# Altium PCB NIXIEclock未铺地.PcbDoc (part 2 of 2)
Units mil, origin at the board's own origin, x right, y up, seen from the top; angles counter-clockwise.
Board outline 8475 x 2960 mil, 2 copper layers (Top Layer, Bottom Layer); 232 components, 292 nets, 854 pads, 200 vias.
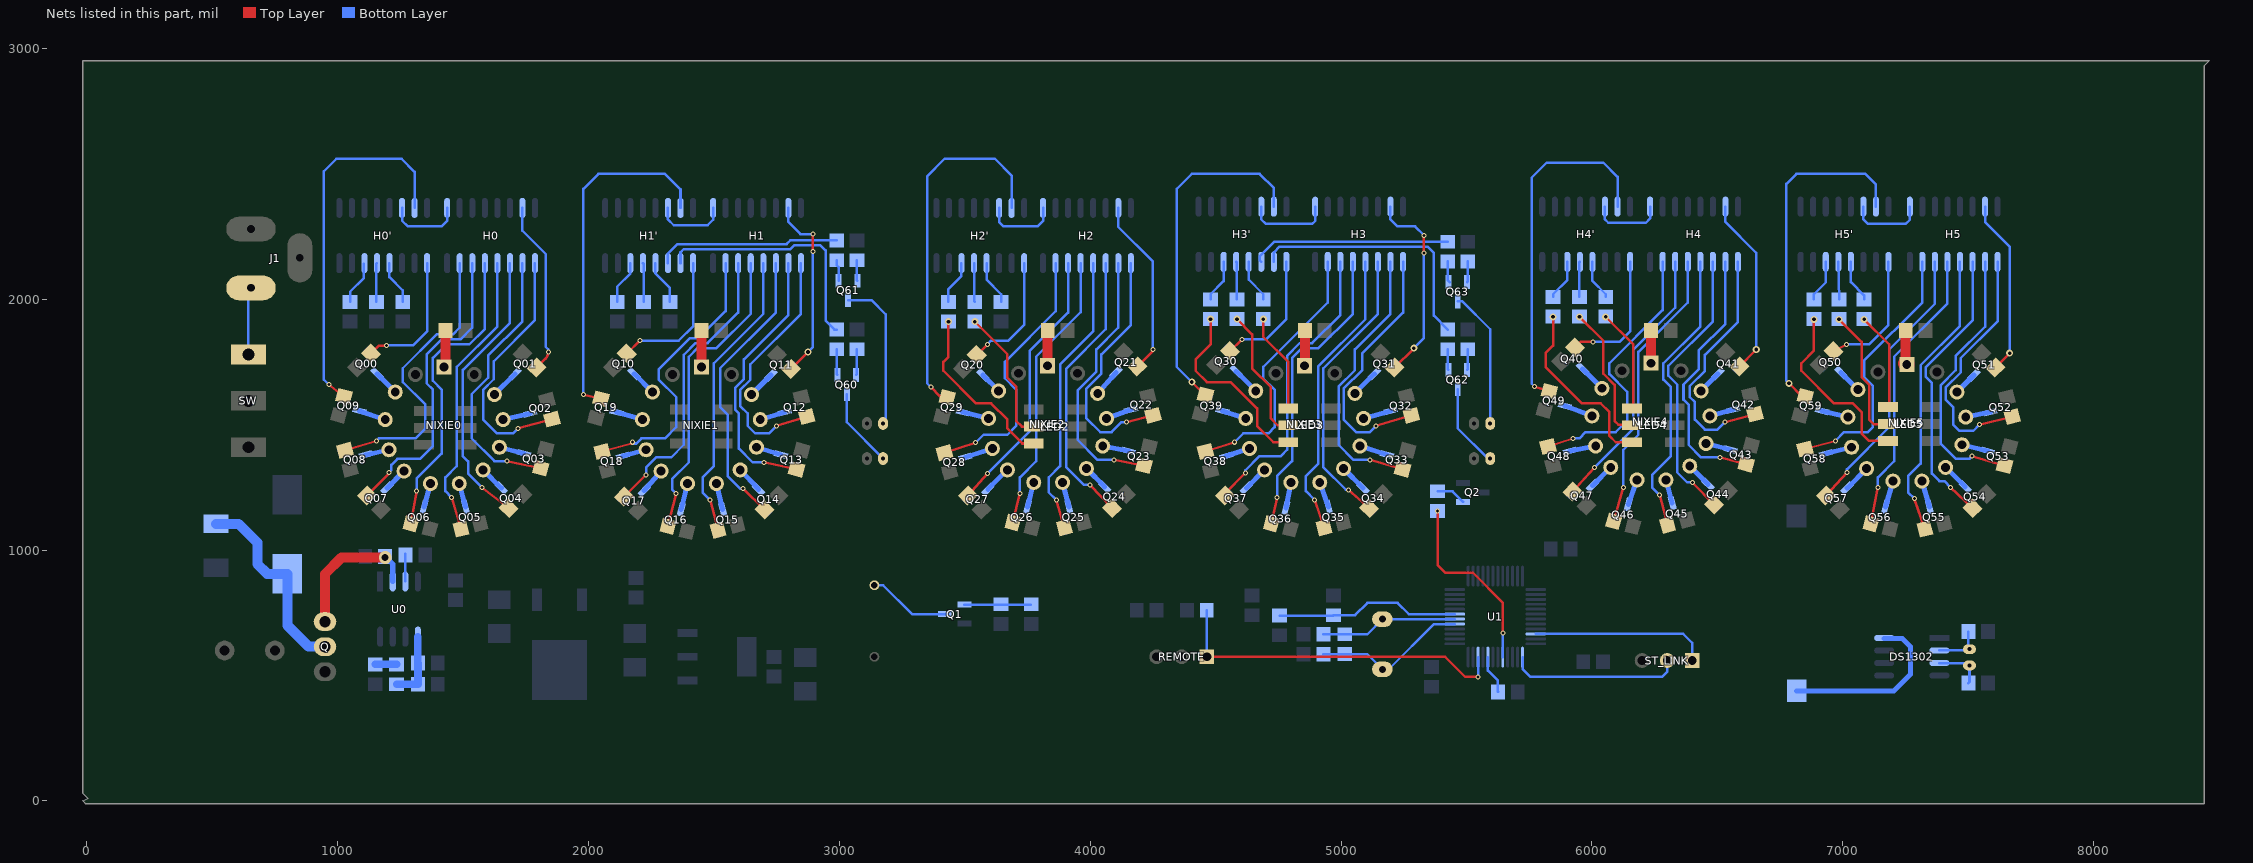
[diagram p2: the nets of this part, all layers, seen from the top]

## Via types
v1: diameter 20, hole 12, Top Layer to Bottom Layer, 85 vias
v2: diameter 28, hole 15, Top Layer to Bottom Layer, 84 vias
v3: diameter 30, hole 20, Top Layer to Bottom Layer, 23 vias
v4: diameter 118.11, hole 118.11, Top Layer to Bottom Layer, 4 vias
v5: diameter 50, hole 28, Top Layer to Bottom Layer, 2 vias
v6: diameter 59.06, hole 59.06, Top Layer to Bottom Layer, 2 vias

## Nets (pads, with @x,y where several pads share a name; then routed paths per layer and width w, separated by ;. In a path a pad name is that pad's centre, name@x,y a point inside that pad or via, vN(x,y) a via of type N, cw(c..) or ccw(c..) an arc to the next point about the centre after c; other vN are vias at no path point) (continued)
LED2.G: LED2.3 R81.2 | length 704.5
  Top Layer w10: v2(3435,1910.63) 3435,1770 3415,1750 3415,1715 3545,1585 3605,1585 3670,1520 3670,1485 3730,1425 LED2.3@3775,1425
LED2.R: LED2.2 R80.2 | length 543.3
  Top Layer w10: v2(3540,1910.63) 3670,1780.63 3670,1686.36 3705,1651.36 3705,1515 3727.5,1492.5 LED2.2@3775,1492.5
LED3.B: LED3.1 R94.2 | length 397.1
  Top Layer w10: v2(4690,1920.63) 4690,1850 4790,1750 LED3.1@4790,1565
LED3.G: LED3.3 R96.2 | length 759.5
  Top Layer w10: v2(4480,1920.63) 4480,1820 4420,1760 4420,1715 4465,1670 4560,1670 4665,1565 4665,1495 4730,1430 LED3.3@4790,1430
LED3.R: LED3.2 R95.2 | length 532.9
  Top Layer w10: v2(4585,1920.63) 4645.63,1860 4645.63,1724.37 4720,1650 4720,1525 4747.5,1497.5 LED3.2@4790,1497.5
LED4.B: LED4.1 R107.2 | length 412.6
  Top Layer w10: v2(6055,1930) 6165,1820 6165,1570 LED4.1@6160,1565
LED4.G: LED4.3 R109.2 | length 737.3
  Top Layer w10: v2(5845,1930) 5845,1815 5815,1785 5815,1730 5960,1585 6035,1585 6070,1550 6070,1455 6095,1430 LED4.3@6160,1430
LED4.R: LED4.2 R108.2 | length 550.2
  Top Layer w10: v2(5950,1930) 6045,1835 6045,1703.64 6090,1658.64 6090,1515 6105,1500 6157.5,1500 LED4.2@6160,1497.5
LED5.B: LED5.1 R121.2 | length 393.5
  Top Layer w10: v2(7085,1920) 7185,1820 7185,1575 LED5.1@7180,1570
LED5.G: LED5.3 R123.2 | length 736.5
  Top Layer w10: v2(6885,1920) 6885,1795 6835,1745 6835,1715 6965,1585 7040,1585 7075,1550 7075,1465 7105,1435 LED5.3@7180,1435
LED5.R: LED5.2 R122.2 | length 532
  Top Layer w10: v2(6985,1920) 7075,1830 7075,1690 7105,1660 7105,1520 7122.5,1502.5 LED5.2@7180,1502.5
LEDBREATH: R140.2 U1.41 | length 754.4
  Top Layer w10: v1(5385,1155.63) 5385,940 5415,910 5525,910 5645,790 v1(5645,670)
  Bottom Layer w10: U1.41@5644.53,573.58 5644.53,669.53 v1(5645,670)
NEON.0: Q60.2 R64.2 | length 103.3
  Bottom Layer w10: R64.2@2990,1800.63 2990,1700.98 Q60.2@2992.6,1698.39
NEON.1: Q61.2 R65.2 | length 85.4
  Bottom Layer w10: R65.2@2990,2155.63 2990,2135 2997.6,2127.4 Q61.2@2997.6,2073.39
NEON.2: Q62.2 R92.2 | length 83.3
  Bottom Layer w10: R92.2@5425,1800.63 5425,1720.98 Q62.2@5427.6,1718.39
NEON.3: Q63.2 R93.2 | length 85.4
  Bottom Layer w10: R93.2@5425,2150.63 5425,2075.98 Q63.2@5432.6,2068.39
NetBEEP_2: BEEP.2 Q1.1 | length 329.2
  Bottom Layer w10: BEEP.2@3140,860 3175,860 3290,745 Q1.1@3421.61,745
NetBT0_1: BT0.1 DS1302.8 | length 709.9
  Bottom Layer w20: BT0.1@6815.98,439.21 7204.21,439.21 7270,505 7270,615 7237,648 DS1302.8@7165,648
NetC11_1: C11.1 U0.3 | length 110.3
  Bottom Layer w10: U0.3@1270,875 1270,984.37 C11.1@1270.63,985
NetC12_2: C12.2 R11.1 R12.2 U0.5 | length 274.4
  Bottom Layer w30: R11.1@1235.63,465 R12.2@1320.63,465 C12.2@1320.63,550 ; C12.2@1320,550.63 U0.5@1320,655
NetC60_1: C60.1 DS1302.3 Y2.2 | length 196.2
  Bottom Layer w10: DS1302.3@7385,550 7495.43,550 Y2.2@7505,540.43 7505,474.37 C60.1@7500.63,470
NetC61_1: C61.1 DS1302.2 Y2.1 | length 190.6
  Bottom Layer w10: DS1302.2@7385,600 Y2.1@7505,600 ; Y2.1@7500.63,604.37 C61.1@7500.63,675
NetD0_3: D0.1 L0.1 Q.2 | length 808.1
  Bottom Layer w40: D0.1@515,1105 605,1105 680,1030 680,945 719.5,905.5 L0.1@799.88,905.5 799.88,700.12 885,615 Q.2@950,615
NetH0'_1: H0'.1 R48.1 | length 532.1
  Top Layer w10: R48.1@1132.84,1782.84 1165,1815 v1(1195,1815)
  Bottom Layer w10: v1@1195,1817.5 1302.5,1817.5 1357,1872 H0'.1@1357,2144
NetH0'_4: H0'.4 R51.1 | length 176.6
  Bottom Layer w10: H0'.4@1207,2144 1207,2088 1260,2035 R51.1@1260,1989.37
NetH0'_5: H0'.5 R52.1 | length 155.5
  Bottom Layer w10: R52.1@1155,1989.37 1155,2142 H0'.5@1157,2144
NetH0'_6: H0'.6 R53.1 | length 175.4
  Bottom Layer w10: R53.1@1050,1989.37 1050,2030 1105,2085 H0'.6@1105,2142
NetH0'_15: H0'.15 R54.2 | length 1482.9
  Top Layer w10: v1(965,1660) R54.2@1025.19,1613.03
  Bottom Layer w10: v1(965,1660) 945,1680 945,2510 995,2560 1255,2560 1307,2508 H0'.15@1307,2364
NetH0_1: H0.1 R40.1 | length 1021
  Top Layer w10: v1(1720,1485) R40.1@1855.19,1521.97
  Bottom Layer w10: v1(1720,1485) 1700,1465 1635,1465 1580,1520 1580,1638.64 1622.5,1681.14 1622.5,1752.5 1787,1917 H0.1@1787,2144
NetH0_2: H0.2 R41.1 | length 1097.6
  Top Layer w10: v1(1675,1355) R41.1@1809.81,1326.97
  Bottom Layer w10: v1(1675,1355) 1625,1355 1535,1445 1535,1621.92 1600,1686.92 1600,1775 1737,1912 H0.2@1737,2144
NetH0_3: H0.3 R42.1 | length 1138
  Top Layer w10: v1(1575,1250) R42.1@1682.16,1167.16
  Bottom Layer w10: v1(1575,1250) 1520,1305 1520,1353.64 1500,1373.64 1500,1718.64 1687,1905.64 H0.3@1687,2144
NetH0_4: H0.4 R43.1 | length 1160.6
  Top Layer w10: v1(1455,1210) R43.1@1491.97,1084.81
  Bottom Layer w10: v1(1455,1210) 1430,1235 1430,1290 1475,1335 1475,1730 1637,1892 H0.4@1637,2144
NetH0_5: H0.5 R44.1 | length 1235.9
  Top Layer w10: R44.1@1291.97,1105.19 v1(1315,1235)
  Bottom Layer w10: v1(1315,1235) 1315,1285 1415,1385 1415,1640 1380,1675 1380,1766.21 1433.79,1820 1525,1820 1587,1882 H0.5@1587,2144
NetH0_6: H0.6 R45.1 | length 1217.4
  Top Layer w10: R45.1@1117.16,1217.84 1205,1305.68 v1(1205,1310)
  Bottom Layer w10: v1(1205,1310) 1215,1320 1215,1340 1238.64,1363.64 1328.64,1363.64 1380,1415 1380,1640 1355,1665 1355,1780 1415,1840 1490,1840 1537,1887 H0.6@1537,2144
NetH0_7: H0.7 R46.1 | length 1174.6
  Top Layer w10: R46.1@1029.81,1398.03 v1(1155,1435)
  Bottom Layer w10: v1(1155,1435) 1165,1445 1310,1445 1350,1485 1350,1580 1260,1670 1260,1725 1395,1860 1460,1860 1487,1887 H0.7@1487,2144
NetH0_15: H0.15 R47.2 | length 697.4
  Top Layer w10: R47.2@1792.84,1727.16 1828.91,1763.24 ccw(c1802.15,1790) v1(1840,1790)
  Bottom Layer w10: H0.15@1737,2364 1737,2273 1830,2180 1830,1810 1840,1800 v1(1840,1790)
NetH1'_1: H1'.1 R63.1 | length 561.4
  Top Layer w10: R63.1@2152.84,1782.84 v1(2205,1835)
  Bottom Layer w10: v1(2205,1835) 2360,1835 2417,1892 H1'.1@2417,2144
NetH1'_2: H1'.2 R64.1 | length 980.6
  Bottom Layer w10: H1'.2@2367,2144 2367,2187 2380,2200 2805,2200 2820,2215 2925,2215 2945,2195 2945,1915 2980.63,1879.37 R64.1@2990,1879.37
NetH1'_3: H1'.3 R65.1 | length 733.2
  Bottom Layer w10: H1'.3@2317,2144 2317,2182 2355,2220 2790,2220 2805,2235 2989.37,2235 R65.1@2990,2234.37
NetH1'_4: H1'.4 R66.1 | length 178.7
  Bottom Layer w10: H1'.4@2267,2144 2267,2103 2325,2045 R66.1@2325,1989.37
NetH1'_5: H1'.5 R67.1 | length 155.9
  Bottom Layer w10: H1'.5@2217,2144 2220,2141 R67.1@2220,1989.37
NetH1'_6: H1'.6 R68.1 | length 176.2
  Bottom Layer w10: R68.1@2115,1989.37 2115,2050 2167,2102 H1'.6@2167,2144
NetH1'_15: H1'.15 R69.2 | length 1403.7
  Top Layer w10: v1(1980,1620) R69.2@2050.19,1603.03
  Bottom Layer w10: v1(1980,1620) 1980,2440 2040,2500 2305,2500 2367,2438 H1'.15@2367,2364
NetH1_1: H1.1 R55.1 | length 1027.3
  Top Layer w10: v1(2750,1495) R55.1@2870.19,1531.97
  Bottom Layer w10: v1(2750,1495) 2720,1465 2665,1465 2635,1495 2635,1545 2605,1575 2605,1638.64 2645,1678.64 2645,1740 2847,1942 H1.1@2847,2144
NetH1_2: H1.2 R56.1 | length 1088.6
  Top Layer w10: v1(2700,1350) R56.1@2829.81,1321.97
  Bottom Layer w10: v1(2700,1350) 2655,1350 2600,1405 2600,1545 2585,1560 2585,1646.92 2620,1681.92 2620,1760 2797,1937 H1.2@2797,2144
NetH1_3: H1.3 R57.1 | length 1154.7
  Top Layer w10: v1(2616.47,1245) R57.1@2702.16,1162.16
  Bottom Layer w10: v1(2616.47,1245) 2605,1245 2555,1295 2555,1540 2525,1570 2525,1725 2747,1947 H1.3@2747,2144
NetH1_4: H1.4 R58.1 | length 1181
  Top Layer w10: v1(2485,1200) R58.1@2516.97,1079.81
  Bottom Layer w10: v1(2485,1200) 2455,1230 2455,1290 2500,1335 2500,1745 2697,1942 H1.4@2697,2144
NetH1_5: H1.5 R59.1 | length 1232.3
  Top Layer w10: R59.1@2316.97,1095.19 v1(2350,1225)
  Bottom Layer w10: v1(2350,1225) 2335,1240 2335,1285 2400,1350 2400,1770 2435,1805 2510,1805 2647,1942 H1.5@2647,2144
NetH1_6: H1.6 R60.1 | length 1183.2
  Top Layer w10: R60.1@2142.16,1212.84 v1@2229.66,1300.34
  Bottom Layer w10: v1(2230,1300) 2230,1330 2270,1370 2330,1370 2380,1420 2380,1778.28 2426.72,1825 2475,1825 2597,1947 H1.6@2597,2144
NetH1_7: H1.7 R61.1 | length 1147.8
  Top Layer w10: R61.1@2054.81,1393.03 2171.36,1425 2175,1428.64 v1(2175,1430)
  Bottom Layer w10: v1(2175,1430) 2175,1425 2191.36,1425 2211.36,1445 2305,1445 2350,1490 2350,1610 2280,1680 2280,1720 2405,1845 2439,1845 2547,1953 H1.7@2547,2144
NetH1_15: H1.15 R62.2 | length 747.8
  Top Layer w10: R62.2@2807.84,1722.16 2875,1789.32 v2(2875,1790) ; v1(2895,2190) v1(2895,2260)
  Bottom Layer w10: H1.15@2797,2364 2797,2308 2845,2260 v1(2895,2260) ; v2(2875,1790) 2895,1810 v1(2895,2190)
NetH2'_1: H2'.1 R78.1 | length 484.9
  Top Layer w10: R78.1@3547.84,1777.84 v1(3590,1820)
  Bottom Layer w10: v1(3590,1820) 3605,1835 3674,1835 3737,1898 H2'.1@3737,2144
NetH2'_4: H2'.4 R79.1 | length 178.7
  Bottom Layer w10: H2'.4@3587,2144 3587,2078 3645,2020 R79.1@3645,1989.37
NetH2'_5: H2'.5 R80.1 | length 155.9
  Bottom Layer w10: H2'.5@3537,2144 3537,1992.37 R80.1@3540,1989.37
NetH2'_6: H2'.6 R81.1 | length 176.2
  Bottom Layer w10: R81.1@3435,1989.37 3435,2040 3487,2092 H2'.6@3487,2144
NetH2'_15: H2'.15 R82.2 | length 1460
  Top Layer w10: v1@3370,1650 v1(3365,1650) 3401.87,1613.13 3408.82,1613.13 R82.2@3430.19,1608.03
  Bottom Layer w10: v1@3370,1650 v1(3365,1650) 3350,1665 3350,2490 3420,2560 3620,2560 3687,2493 H2'.15@3687,2364
NetH2_1: H2.1 R70.1 | length 1000.3
  Top Layer w10: v1(4145,1510) R70.1@4250.19,1536.97
  Bottom Layer w10: v1(4145,1510) 4125,1510 4085,1470 4040,1470 3985,1525 3985,1643.64 4045,1703.64 4045,1780 4162,1897 H2.1@4162,2144
NetH2_2: H2.2 R71.1 | length 1071.2
  Top Layer w10: v1(4095,1360) R71.1@4214.81,1336.97
  Bottom Layer w10: v1(4095,1360) 4030,1360 3950,1440 3950,1636.92 4025,1711.92 4025,1800 4112,1887 H2.2@4112,2144
NetH2_3: H2.3 R72.1 | length 1130.4
  Top Layer w10: v1(4000,1260) R72.1@4087.16,1167.16
  Bottom Layer w10: v1(4000,1260) 3975,1260 3905,1330 3905,1723.64 4062,1880.64 H2.3@4062,2144
NetH2_4: H2.4 R73.1 | length 1144.5
  Top Layer w10: v1(3865,1200) R73.1@3896.97,1089.81
  Bottom Layer w10: v1(3865,1200) 3835,1230 3835,1290 3880,1335 3880,1740 4012,1872 H2.4@4012,2144
NetH2_5: H2.5 R74.1 | length 1137.4
  Top Layer w10: R74.1@3691.97,1110.19 v1(3720,1225)
  Bottom Layer w10: v1(3720,1225) 3720,1290 3785,1355 3785,1771.21 3962,1948.21 H2.5@3962,2144
NetH2_6: H2.6 R75.1 | length 1089.2
  Top Layer w10: R75.1@3512.16,1217.84 v1(3590,1305)
  Bottom Layer w10: v1(3590,1305) 3760,1475 3760,1795 3912,1947 H2.6@3912,2144
NetH2_7: H2.7 R76.1 | length 1070.6
  Top Layer w10: R76.1@3419.81,1388.03 v1(3543.03,1428.03)
  Bottom Layer w10: v1(3543.03,1428.03) 3575,1460 3670,1460 3705,1495 3705,1640 3660,1685 3660,1750 3862,1952 H2.7@3862,2144
NetH2_15: H2.15 R77.2 | length 714.7
  Top Layer w10: R77.2@4187.84,1732.16 4250,1794.32 v1(4250,1800)
  Bottom Layer w10: H2.15@4112,2364 4112,2288 4250,2150 v1(4250,1800)
NetH3'_1: H3'.1 R91.1 | length 504.7
  Top Layer w10: R91.1@4557.84,1792.84 v1(4605,1840)
  Bottom Layer w10: v1(4605,1840) 4700,1840 4782,1922 H3'.1@4782,2149
NetH3'_2: H3'.2 R92.1 | length 1024.3
  Bottom Layer w10: H3'.2@4732,2149 4732,2187 4755,2210 5345,2210 5370,2185 5370,1934.37 R92.1@5425,1879.37
NetH3'_3: H3'.3 R93.1 | length 798.1
  Bottom Layer w10: H3'.3@4682,2149 4675,2156 4675,2170 4735,2230 R93.1@5424.37,2230
NetH3'_4: H3'.4 R94.1 | length 173.7
  Bottom Layer w10: H3'.4@4632,2149 4632,2078 4690,2020 R94.1@4690,1999.37
NetH3'_5: H3'.5 R95.1 | length 150.9
  Bottom Layer w10: H3'.5@4582,2149 4585,2146 R95.1@4585,1999.37
NetH3'_6: H3'.6 R96.1 | length 171.2
  Bottom Layer w10: R96.1@4480,1999.37 4480,2020 4532,2072 H3'.6@4532,2149
NetH3'_15: H3'.15 R97.2 | length 1381
  Top Layer w10: v2(4405,1670) 4456.97,1618.03 R97.2@4460.19,1618.03
  Bottom Layer w10: v2(4405,1670) 4345,1730 4345,2440 4405,2500 4675,2500 4732,2443 H3'.15@4732,2369
NetH3_1: H3.1 R83.1 | length 1034.6
  Top Layer w10: v1(5140,1495) R83.1@5280.19,1536.97
  Bottom Layer w10: v1(5140,1495) 5115,1470 5060,1470 5010,1520 5010,1643.64 5085,1718.64 5085,1785 5247,1947 H3.1@5247,2149
NetH3_2: H3.2 R84.1 | length 1099.9
  Top Layer w10: v1(5115,1360) R84.1@5244.81,1321.97
  Bottom Layer w10: v1(5115,1360) 5050,1360 4990,1420 4990,1651.92 5055,1716.92 5055,1800 5197,1942 H3.2@5197,2149
NetH3_3: H3.3 R85.1 | length 1156.4
  Top Layer w10: v1(5030,1240) R85.1@5112.16,1167.16
  Bottom Layer w10: v1@5030.68,1240.68 5019.32,1240.68 4930,1330 4930,1725 5147,1942 H3.3@5147,2149
NetH3_4: H3.4 R86.1 | length 1177.9
  Top Layer w10: v1(4895,1200) R86.1@4931.97,1089.81
  Bottom Layer w10: v1(4895,1200) 4860,1235 4860,1295 4910,1345 4910,1733.28 5097,1920.28 H3.4@5097,2149
NetH3_5: H3.5 R87.1 | length 1210.2
  Top Layer w10: R87.1@4721.97,1105.19 v1(4745,1210)
  Bottom Layer w10: v1(4745,1210) 4745,1295 4805,1355 4805,1766.21 4843.79,1805 4910,1805 5047,1942 H3.5@5047,2149
NetH3_6: H3.6 R88.1 | length 1200.4
  Top Layer w10: R88.1@4537.16,1217.84 4537.16,1225.8 v1(4618.18,1306.82)
  Bottom Layer w10: v1(4618.18,1306.82) 4618.18,1318.18 4675,1375 4760,1375 4785,1400 4785,1774.5 4835.5,1825 4885,1825 4997,1937 H3.6@4997,2149
NetH3_7: H3.7 R89.1 | length 1089.9
  Top Layer w10: R89.1@4459.81,1393.03 v1(4575,1430)
  Bottom Layer w10: v1(4575,1430) 4610,1465 4710,1465 4735,1490 4735,1640 4690,1685 4690,1730 4947,1987 H3.7@4947,2149
NetH3_15: H3.15 R90.2 | length 781.5
  Top Layer w10: R90.2@5212.84,1727.16 5290,1804.32 v2(5290,1805) ; v1@5330,2190 v1@5330,2250
  Bottom Layer w10: H3.15@5197,2369 5197,2318 5225,2290 5295,2290 v1(5330,2255) v1@5330,2260 ; v2(5290,1805) 5330,1845 v1(5330,2185)
NetH4'_1: H4'.1 R106.1 | length 522.7
  Top Layer w10: R106.1@5932.84,1807.84 5955,1830 v1(6005,1830)
  Bottom Layer w10: v1(6005,1830) 6110,1830 6152,1872 H4'.1@6152,2149
NetH4'_4: H4'.4 R107.1 | length 161.6
  Bottom Layer w10: H4'.4@6002,2149 6002,2073 6055,2020 R107.1@6055,2009.37
NetH4'_5: H4'.5 R108.1 | length 140.5
  Bottom Layer w10: R108.1@5950,2009.37 5950,2147 H4'.5@5952,2149
NetH4'_6: H4'.6 R109.1 | length 163.2
  Bottom Layer w10: R109.1@5845,2009.37 5845,2020 5902,2077 H4'.6@5902,2149
NetH4'_15: H4'.15 R110.2 | length 1409.2
  Top Layer w10: v1(5771.96,1651.26) R110.2@5830.19,1633.03
  Bottom Layer w10: v1(5771.96,1651.26) 5760,1663.22 5760,2485 5820,2545 6045,2545 6102,2488 H4'.15@6102,2369
NetH4_1: H4.1 R98.1 | length 990.2
  Top Layer w10: v1(6530,1510) R98.1@6650.19,1541.97
  Bottom Layer w10: v1(6530,1510) 6500,1480 6450,1480 6410,1520 6410,1590 6390,1610 6390,1653.64 6450,1713.64 6450,1778 6582,1910 H4.1@6582,2149
NetH4_2: H4.2 R99.1 | length 1060.7
  Top Layer w10: v1(6510,1370) R99.1@6614.81,1341.97
  Bottom Layer w10: v1(6510,1370) 6435,1370 6385,1420 6385,1580 6365,1600 6365,1660 6425,1720 6425,1795 6532,1902 H4.2@6532,2149
NetH4_3: H4.3 R100.1 | length 1127.1
  Top Layer w10: v1(6400,1270) R100.1@6487.16,1182.16
  Bottom Layer w10: v1(6400,1270) 6380,1270 6340,1310 6340,1660 6305,1695 6305,1735 6482,1912 H4.3@6482,2149
NetH4_4: H4.4 R101.1 | length 1170.2
  Top Layer w10: v1(6270,1220) R101.1@6301.97,1099.81
  Bottom Layer w10: v1(6270,1220) 6240,1250 6240,1300 6315,1375 6315,1650 6285,1680 6285,1745 6432,1892 H4.4@6432,2149
NetH4_5: H4.5 R102.1 | length 1145.5
  Top Layer w10: R102.1@6086.97,1115.19 v1(6125,1250)
  Bottom Layer w10: v1(6125,1250) 6125,1400 6185,1460 6185,1790 6382,1987 H4.5@6382,2149
NetH4_6: H4.6 R103.1 | length 1083.4
  Top Layer w10: R103.1@5922.16,1232.84 v1(6010,1330)
  Bottom Layer w10: v1(6010,1330) 6165,1485 6165,1800 6332,1967 H4.6@6332,2149
NetH4_7: H4.7 R104.1 | length 1100
  Top Layer w10: R104.1@5824.81,1413.03 v1(5925,1445)
  Bottom Layer w10: v1(5925,1445) 5950,1445 5975,1470 6095,1470 6140,1515 6140,1631.36 6070,1701.36 6070,1745 6282,1957 H4.7@6282,2149
NetH4_15: H4.15 R105.2 | length 715.6
  Top Layer w10: R105.2@6587.84,1732.16 6655,1799.32 v2(6655,1800)
  Bottom Layer w10: H4.15@6532,2369 6532,2308 6655,2185 v2(6655,1800)
NetH5'_1: H5'.1 R119.1 | length 509.7
  Top Layer w10: R119.1@6962.84,1792.84 v1(7015,1820)
  Bottom Layer w10: v1(7015,1820) 7105,1820 7182,1897 H5'.1@7182,2149
NetH5'_4: H5'.4 R121.1 | length 171.6
  Bottom Layer w10: H5'.4@7032,2149 7032,2068 7085,2015 R121.1@7085,1999.37
NetH5'_5: H5'.5 R122.1 | length 149.7
  Bottom Layer w10: H5'.5@6982,2149 R122.1@6985,1999.37
NetH5'_6: H5'.6 R123.1 | length 169.1
  Bottom Layer w10: R123.1@6885,1999.37 6885,2020 6932,2067 H5'.6@6932,2149
NetH5'_15: H5'.15 R124.2 | length 1365.8
  Top Layer w10: v2(6785,1665) 6836.97,1613.03 R124.2@6850.19,1613.03
  Bottom Layer w10: v2(6785,1665) 6775,1675 6775,2460 6815,2500 7090,2500 7132,2458 H5'.15@7132,2369
NetH5_1: H5.1 R111.1 | length 1006.9
  Top Layer w10: v1(7545,1500) R111.1@7675.19,1531.97
  Bottom Layer w10: v1(7545,1500) 7520,1475 7465,1475 7440,1500 7440,1570 7410,1600 7410,1648.64 7470,1708.64 7470,1765 7617,1912 H5.1@7617,2149
NetH5_2: H5.2 R112.1 | length 1086.6
  Top Layer w10: v1(7515,1375) R112.1@7644.81,1336.97
  Bottom Layer w10: v1(7515,1375) 7505,1365 7450,1365 7390,1425 7390,1656.92 7450,1716.92 7450,1773.28 7567,1890.28 H5.2@7567,2149
NetH5_3: H5.3 R113.1 | length 1149.8
  Top Layer w10: v1(7430,1250) R113.1@7517.16,1167.16
  Bottom Layer w10: v1(7430,1250) 7405,1275 7385,1275 7355,1305 7355,1666.36 7330,1691.36 7330,1728.64 7517,1915.64 H5.3@7517,2149
NetH5_4: H5.4 R114.1 | length 1167.4
  Top Layer w10: v1(7285,1205) R114.1@7326.97,1084.81
  Bottom Layer w10: v1(7285,1205) 7260,1230 7260,1295 7310,1345 7310,1736.92 7467,1893.92 H5.4@7467,2149
NetH5_5: H5.5 R115.1 | length 1161.2
  Top Layer w10: R115.1@7111.97,1105.19 v1(7140,1250)
  Bottom Layer w10: v1(7140,1250) 7140,1290 7205,1355 7205,1771.21 7417,1983.21 H5.5@7417,2149
NetH5_6: H5.6 R116.1 | length 1109.1
  Top Layer w10: R116.1@6932.16,1217.84 v1(7016.36,1310)
  Bottom Layer w10: v1(7016.36,1310) 7016.36,1321.36 7185,1490 7185,1800 7367,1982 H5.6@7367,2149
NetH5_7: H5.7 R117.1 | length 1066.7
  Top Layer w10: R117.1@6849.81,1403.03 v1(6970,1435)
  Bottom Layer w10: v1(6970,1435) 7005,1470 7100,1470 7120,1490 7120,1655 7085,1690 7085,1755 7317,1987 H5.7@7317,2149
NetH5_15: H5.15 R118.2 | length 706.1
  Top Layer w10: R118.2@7607.84,1727.16 7665,1784.32 v2(7665,1785)
  Bottom Layer w10: H5.15@7567,2369 7567,2308 7665,2210 v2(7665,1785)
NetJ1_1: J1.1 SW.3 | length 269.1
  Bottom Layer w10: SW.3@645,1780 645,2035 J1.1@655,2045
NetNeon0_2: Neon0.2 Q60.1 | length 316.5
  Bottom Layer w10: Q60.1@3030,1621.61 3030,1509.57 Neon0.2@3174.57,1365
NetNeon1_2: Neon1.2 Q61.1 | length 612.8
  Bottom Layer w10: Q61.1@3035,1996.61 3128.39,1996.61 3185,1940 3185,1515.43 Neon1.2@3174.57,1505
NetNeon2_2: Neon2.2 Q62.1 | length 336.3
  Bottom Layer w10: Q62.1@5465,1641.61 5465,1485 5585,1365 Neon2.2@5594.57,1365 Neon2.2@5594.57,1365.43
NetNeon3_2: Neon3.2 Q63.1 | length 551.1
  Bottom Layer w10: Q63.1@5465,1991.61 5483.39,1991.61 5594.57,1880.43 Neon3.2@5594.57,1505
NetNIXIE0_a: NIXIE0.a R130.1 | length 139.4
  Top Layer w40: NIXIE0.a@1430.63,1735.63 R130.1@1430.63,1875
NetNIXIE1_a: NIXIE1.a R131.1 | length 144.4
  Top Layer w40: NIXIE1.a@2450.63,1730.63 R131.1@2450.63,1875
NetNIXIE2_a: NIXIE2.a R132.1 | length 139.4
  Top Layer w40: NIXIE2.a@3830.63,1735.63 R132.1@3830.63,1875
NetNIXIE3_a: NIXIE3.a R133.1 | length 139.4
  Top Layer w40: NIXIE3.a@4855.63,1735.63 R133.1@4855.63,1875
NetNIXIE4_a: NIXIE4.a R134.1 | length 129.4
  Top Layer w40: NIXIE4.a@6235,1745 R134.1@6235,1874.37
NetNIXIE5_a: NIXIE5.a R135.1 | length 136.8
  Top Layer w40: NIXIE5.a@7250.63,1744.37 R135.1@7250.63,1875
  Top Layer w60: NIXIE5.a@7250.63,1744.37 NIXIE5.a@7255,1740
NetQ1_2: Q1.2 R160.2 R161.2 | length 264.6
  Bottom Layer w10: Q1.2@3498.39,782.4 R160.2@3763.03,782.4
NetQ2_2: Q2.2 R140.1 | length 118.9
  Bottom Layer w10: R140.1@5385,1234.37 5444.84,1234.37 Q2.2@5486.61,1192.6
NetQ60_3: Q60.3 R170.1 | length 103.3
  Bottom Layer w10: Q60.3@3067.4,1698.39 3070,1700.98 R170.1@3070,1800.63
NetQ61_3: Q61.3 R171.1 | length 83.2
  Bottom Layer w10: R171.1@3070,2155.63 3070,2075.79 Q61.3@3072.4,2073.39
NetQ62_3: Q62.3 R172.1 | length 83.3
  Bottom Layer w10: Q62.3@5502.4,1718.39 5505,1720.98 R172.1@5505,1800.63
NetQ63_3: Q63.3 R173.1 | length 83.3
  Bottom Layer w10: Q63.3@5502.4,2068.39 5505,2070.98 R173.1@5505,2150.63
NetQ_2: Q.3 R10.2 U0.2 | length 566.8
  Top Layer w10: v5(1189.37,970.63) v5@1190,970
  Top Layer w40: Q.3@950,715 950,905 1015,970 v5@1189.37,970
  Bottom Layer w20: R10.2@1191.56,972.82 1220,944.37 U0.2@1220,875
NetR11_2: R11.2 R13.1 | length 85
  Bottom Layer w30: R13.1@1150,544.37 R11.2@1235,544.37
NetR22_1: R22.1 U1.44 | length 155.2
  Bottom Layer w10: U1.44@5585.47,573.58 5585.47,519.53 5625,480 5625,435.63 R22.1@5625.63,435
NIXIE0.0: NIXIE0.l Q00.1 | length 103
  Bottom Layer w20: Q00.1@1157.14,1702.86 NIXIE0.l@1230,1630
NIXIE0.1: NIXIE0.c Q01.1 | length 117.2
  Bottom Layer w20: NIXIE0.c@1625,1620 Q01.1@1707.86,1702.86
NIXIE0.2: NIXIE0.d Q02.1 | length 110.8
  Bottom Layer w20: NIXIE0.d@1660,1520 Q02.1@1767.92,1545.07
NIXIE0.3: NIXIE0.e Q03.1 | length 101.1
  Bottom Layer w20: NIXIE0.e@1645,1410 Q03.1@1742.92,1384.93
NIXIE0.4: NIXIE0.f Q04.1 | length 103
  Bottom Layer w20: NIXIE0.f@1580,1320 Q04.1@1652.86,1247.14
NIXIE0.5: NIXIE0.g Q05.1 | length 96.2
  Bottom Layer w20: NIXIE0.g@1485,1265 Q05.1@1510.07,1172.08
NIXIE0.6: NIXIE0.h Q06.1 | length 96.2
  Bottom Layer w20: Q06.1@1344.93,1172.08 NIXIE0.h@1370,1265
NIXIE0.7: NIXIE0.i Q07.1 | length 96
  Bottom Layer w20: Q07.1@1197.14,1247.14 NIXIE0.i@1265,1315
NIXIE0.8: NIXIE0.j Q08.1 | length 95.1
  Bottom Layer w20: Q08.1@1112.08,1379.93 NIXIE0.j@1205,1400
NIXIE0.9: NIXIE0.k Q09.1 | length 108.7
  Bottom Layer w20: Q09.1@1087.08,1555.07 NIXIE0.k@1190,1520
NIXIE1.0: NIXIE1.l Q10.1 | length 103
  Bottom Layer w20: Q10.1@2182.14,1702.86 NIXIE1.l@2255,1630
NIXIE1.1: NIXIE1.c Q11.1 | length 110.1
  Bottom Layer w20: NIXIE1.c@2650,1620 Q11.1@2727.86,1697.86
NIXIE1.2: NIXIE1.d Q12.1 | length 102.4
  Bottom Layer w20: NIXIE1.d@2685,1520 Q12.1@2782.92,1550.07
NIXIE1.3: NIXIE1.e Q13.1 | length 102.4
  Bottom Layer w20: NIXIE1.e@2670,1410 Q13.1@2767.92,1379.93
NIXIE1.4: NIXIE1.f Q14.1 | length 106.6
  Bottom Layer w20: NIXIE1.f@2605,1320 Q14.1@2677.86,1242.14
NIXIE1.5: NIXIE1.g Q15.1 | length 105.9
  Bottom Layer w20: NIXIE1.g@2510,1265 Q15.1@2535.07,1162.08
NIXIE1.6: NIXIE1.h Q16.1 | length 105.9
  Bottom Layer w20: Q16.1@2369.93,1162.08 NIXIE1.h@2395,1265
NIXIE1.7: NIXIE1.i Q17.1 | length 103.3
  Bottom Layer w20: Q17.1@2222.14,1237.14 NIXIE1.i@2290,1315
NIXIE1.8: NIXIE1.j Q18.1 | length 96.2
  Bottom Layer w20: Q18.1@2137.08,1374.93 NIXIE1.j@2230,1400
NIXIE1.9: NIXIE1.k Q19.1 | length 107.2
  Bottom Layer w20: Q19.1@2112.08,1550.07 NIXIE1.k@2215,1520
NIXIE2.0: NIXIE2.l Q20.1 | length 88.9
  Bottom Layer w20: Q20.1@3572.14,1697.86 NIXIE2.l@3635,1635
NIXIE2.1: NIXIE2.c Q21.1 | length 110.3
  Bottom Layer w20: NIXIE2.c@4030,1625 Q21.1@4102.86,1707.86
NIXIE2.2: NIXIE2.d Q22.1 | length 104
  Bottom Layer w20: NIXIE2.d@4065,1525 Q22.1@4162.92,1560.07
NIXIE2.3: NIXIE2.e Q23.1 | length 104.9
  Bottom Layer w20: NIXIE2.e@4050,1415 Q23.1@4152.92,1394.93
NIXIE2.4: NIXIE2.f Q24.1 | length 103
  Bottom Layer w20: NIXIE2.f@3985,1325 Q24.1@4057.86,1252.14
NIXIE2.5: NIXIE2.g Q25.1 | length 101.1
  Bottom Layer w20: NIXIE2.g@3890,1270 Q25.1@3915.06,1172.08
NIXIE2.6: NIXIE2.h Q26.1 | length 101.1
  Bottom Layer w20: Q26.1@3749.93,1172.08 NIXIE2.h@3775,1270
NIXIE2.7: NIXIE2.i Q27.1 | length 110.1
  Bottom Layer w20: Q27.1@3592.14,1242.14 NIXIE2.i@3670,1320
NIXIE2.8: NIXIE2.j Q28.1 | length 113.5
  Bottom Layer w20: Q28.1@3502.08,1369.93 NIXIE2.j@3610,1405
NIXIE2.9: NIXIE2.k Q29.1 | length 105.9
  Bottom Layer w20: Q29.1@3492.08,1550.07 NIXIE2.k@3595,1525
NIXIE3.0: NIXIE3.l Q30.1 | length 110.1
  Bottom Layer w20: Q30.1@4582.14,1712.86 NIXIE3.l@4660,1635
NIXIE3.1: NIXIE3.c Q31.1 | length 110.1
  Bottom Layer w20: NIXIE3.c@5055,1625 Q31.1@5132.86,1702.86
NIXIE3.2: NIXIE3.d Q32.1 | length 112
  Bottom Layer w20: NIXIE3.d@5090,1525 Q32.1@5197.92,1555.07
NIXIE3.3: NIXIE3.e Q33.1 | length 113.5
  Bottom Layer w20: NIXIE3.e@5075,1415 Q33.1@5182.92,1379.93
NIXIE3.4: NIXIE3.f Q34.1 | length 110.1
  Bottom Layer w20: NIXIE3.f@5010,1325 Q34.1@5087.86,1247.14
NIXIE3.5: NIXIE3.g Q35.1 | length 104
  Bottom Layer w20: NIXIE3.g@4915,1270 Q35.1@4950.06,1172.08
NIXIE3.6: NIXIE3.h Q36.1 | length 104.9
  Bottom Layer w20: Q36.1@4779.94,1167.08 NIXIE3.h@4800,1270
NIXIE3.7: NIXIE3.i Q37.1 | length 103
  Bottom Layer w20: Q37.1@4622.14,1247.14 NIXIE3.i@4695,1320
NIXIE3.8: NIXIE3.j Q38.1 | length 97.7
  Bottom Layer w20: Q38.1@4542.08,1374.93 NIXIE3.j@4635,1405
NIXIE3.9: NIXIE3.k Q39.1 | length 97.7
  Bottom Layer w20: Q39.1@4527.08,1555.07 NIXIE3.k@4620,1525
NIXIE4.0: NIXIE4.l Q40.1 | length 110.1
  Bottom Layer w20: Q40.1@5962.14,1722.86 NIXIE4.l@6040,1645
NIXIE4.1: NIXIE4.c Q41.1 | length 96
  Bottom Layer w20: NIXIE4.c@6435,1635 Q41.1@6502.86,1702.86
NIXIE4.2: NIXIE4.d Q42.1 | length 96.2
  Bottom Layer w20: NIXIE4.d@6470,1535 Q42.1@6562.92,1560.07
NIXIE4.3: NIXIE4.e Q43.1 | length 101.1
  Bottom Layer w20: NIXIE4.e@6455,1425 Q43.1@6552.92,1399.93
NIXIE4.4: NIXIE4.f Q44.1 | length 103
  Bottom Layer w20: NIXIE4.f@6390,1335 Q44.1@6462.86,1262.14
NIXIE4.5: NIXIE4.g Q45.1 | length 96.2
  Bottom Layer w20: NIXIE4.g@6295,1280 Q45.1@6320.06,1187.08
NIXIE4.6: NIXIE4.h Q46.1 | length 104
  Bottom Layer w20: Q46.1@6144.94,1182.08 NIXIE4.h@6180,1280
NIXIE4.7: NIXIE4.i Q47.1 | length 103
  Bottom Layer w20: Q47.1@6002.14,1257.14 NIXIE4.i@6075,1330
NIXIE4.8: NIXIE4.j Q48.1 | length 104.9
  Bottom Layer w20: Q48.1@5912.08,1394.93 NIXIE4.j@6015,1415
NIXIE4.9: NIXIE4.k Q49.1 | length 115.1
  Bottom Layer w20: Q49.1@5892.08,1575.07 NIXIE4.k@6000,1535
NIXIE5.0: NIXIE5.l Q50.1 | length 96
  Bottom Layer w20: Q50.1@6992.14,1707.86 NIXIE5.l@7060,1640
NIXIE5.1: NIXIE5.c Q51.1 | length 96
  Bottom Layer w20: NIXIE5.c@7455,1630 Q51.1@7522.86,1697.86
NIXIE5.2: NIXIE5.d Q52.1 | length 100
  Bottom Layer w20: NIXIE5.d@7490,1530 Q52.1@7587.92,1550.07
NIXIE5.3: NIXIE5.e Q53.1 | length 105.9
  Bottom Layer w20: NIXIE5.e@7475,1420 Q53.1@7577.92,1394.93
NIXIE5.4: NIXIE5.f Q54.1 | length 110.1
  Bottom Layer w20: NIXIE5.f@7410,1330 Q54.1@7487.86,1252.14
NIXIE5.5: NIXIE5.g Q55.1 | length 107.2
  Bottom Layer w20: NIXIE5.g@7315,1275 Q55.1@7345.07,1172.08
NIXIE5.6: NIXIE5.h Q56.1 | length 107.2
  Bottom Layer w20: Q56.1@7169.93,1172.08 NIXIE5.h@7200,1275
NIXIE5.7: NIXIE5.i Q57.1 | length 110.1
  Bottom Layer w20: Q57.1@7017.14,1247.14 NIXIE5.i@7095,1325
NIXIE5.8: NIXIE5.j Q58.1 | length 105.9
  Bottom Layer w20: Q58.1@6932.08,1384.93 NIXIE5.j@7035,1410
NIXIE5.9: NIXIE5.k Q59.1 | length 105.9
  Bottom Layer w20: Q59.1@6917.08,1555.07 NIXIE5.k@7020,1530
OSCIN: C26.2 R21.1 U1.5 Y1.2 | length 624.3
  Bottom Layer w10: C26.2@4929.37,585 5014.37,585 R21.1@5015,585.63 5104.37,585.63 Y1.2@5165,525 5190,525 5370.47,705.47 U1.5@5453.58,705.47
OSCOUT: C25.2 R21.2 U1.6 Y1.1 | length 549.7
  Bottom Layer w10: C25.2@4929.37,665 4930,664.37 R21.2@5015,664.37 5104.37,664.37 Y1.1@5165,725 5165.16,725.16 U1.6@5453.58,725.16
QH'.SI.0: H0'.14 H0.9 | length 301.6
  Bottom Layer w10: H0'.14@1257,2364 1257,2313 1280,2290 1415,2290 1437,2312 H0.9@1437,2364
QH'.SI.1: H1'.14 H1.9 | length 291.6
  Bottom Layer w10: H1'.14@2317,2364 2317,2318 2340,2295 2475,2295 2497,2317 H1.9@2497,2364
QH'.SI.2: H2'.14 H2.9 | length 299.6
  Bottom Layer w10: H2'.14@3637,2364 3637,2308 3655,2290 3790,2290 3812,2312 H2.9@3812,2364
QH'.SI.3: H3'.14 H3.9 | length 335.4
  Bottom Layer w10: H3'.14@4682,2369 4682,2318 4700,2300 4885,2300 4897,2312 H3.9@4897,2369
QH'.SI.4: H4'.14 H4.9 | length 290.4
  Bottom Layer w10: H4'.14@6052,2369 6052,2318 6065,2305 6215,2305 6232,2322 H4.9@6232,2369
QH'.SI.5: H5'.14 H5.9 | length 302.5
  Bottom Layer w10: H5'.14@7082,2369 7082,2318 7100,2300 7250,2300 7267,2317 H5.9@7267,2369
REMOTE: R150.2 REMOTE.1 U1.46 | length 1377.4
  Top Layer w10: REMOTE.1@4465,575 5415,575 5495,495 v1(5545,495)
  Bottom Layer w10: R150.2@4464.37,760 4464.37,575.63 REMOTE.1@4465,575 ; v1(5545,495) 5546.1,496.1 U1.46@5546.1,573.58
REST: C20.2 R20.2 U1.7 | length 738.1
  Bottom Layer w10: C20.2@4755,739.37 4968.74,739.37 R20.2@4970,740.63 5055.63,740.63 5105,790 5225,790 5269.84,745.16 5270.16,745.16 ; 5270.16,744.84 U1.7@5453.58,744.84
SWCLK: ST_LINK.2 U1.37 | length 690
  Bottom Layer w10: U1.37@5723.27,573.58 5723.27,526.73 5755,495 6280,495 6300,515 ST_LINK.2@6300,560
SWDIO: ST_LINK.1 U1.34 | length 708.5
  Bottom Layer w10: U1.34@5776.42,666.1 6363.9,666.1 6400,630 ST_LINK.1@6400,560
pads on no net: H0'.2 H0'.3 H0'.7 H0'.9 H1'.7 H1'.9 H2'.2 H2'.3 H2'.7 H2'.9 H3'.7 H3'.9 H4'.2 H4'.3 H4'.7 H4'.9 H5'.2 H5'.3 H5'.7 H5'.9 J1.3 NIXIE0.b NIXIE0.m NIXIE1.b NIXIE1.m NIXIE2.b NIXIE2.m NIXIE3.b NIXIE3.m NIXIE4.b NIXIE4.m NIXIE5.b NIXIE5.m U1.1 U1.2 U1.3 U1.4 U1.10 U1.38 U1.39 U1.40 U1.42 U1.43
copper on no net:
  other v4: 420,420 8050,425 8050,2525 400,2530
  other v6: 6815,640 6815,935.28

## Keep-outs
Keep-Out Layer:
  lines w10: 380.02,2649.79 ccw(c388.7,2563.7) 302.4,2570 302.4,395 ccw(c401.2,393.8) 400,295 ; 380,2650 8065,2650 cw(c8065,2535) 8180,2535 8180,425 ; 395,295 8075,295 ccw(c8065,410) 8180,420

## Other copper
Bottom Layer:
  rectangle net NetJ1_1: 535,1720 775,2160

## Silkscreen, mask and mechanical layers (free items; w line width, h text height)
Bottom Overlay:
  text "SWCLK" at 6355,480 h30 r180
  text "SWDIO" at 6505,480 h30 r180